# Altium PCB 第十二届直立摄像头.PcbDoc (part 1 of 3)
Units mil, origin at the board's own origin, x right, y up, seen from the top; angles counter-clockwise.
Board outline 3925 x 2095 mil, 2 copper layers (Top Layer, Bottom Layer); 127 components, 103 nets, 557 pads, 326 vias.
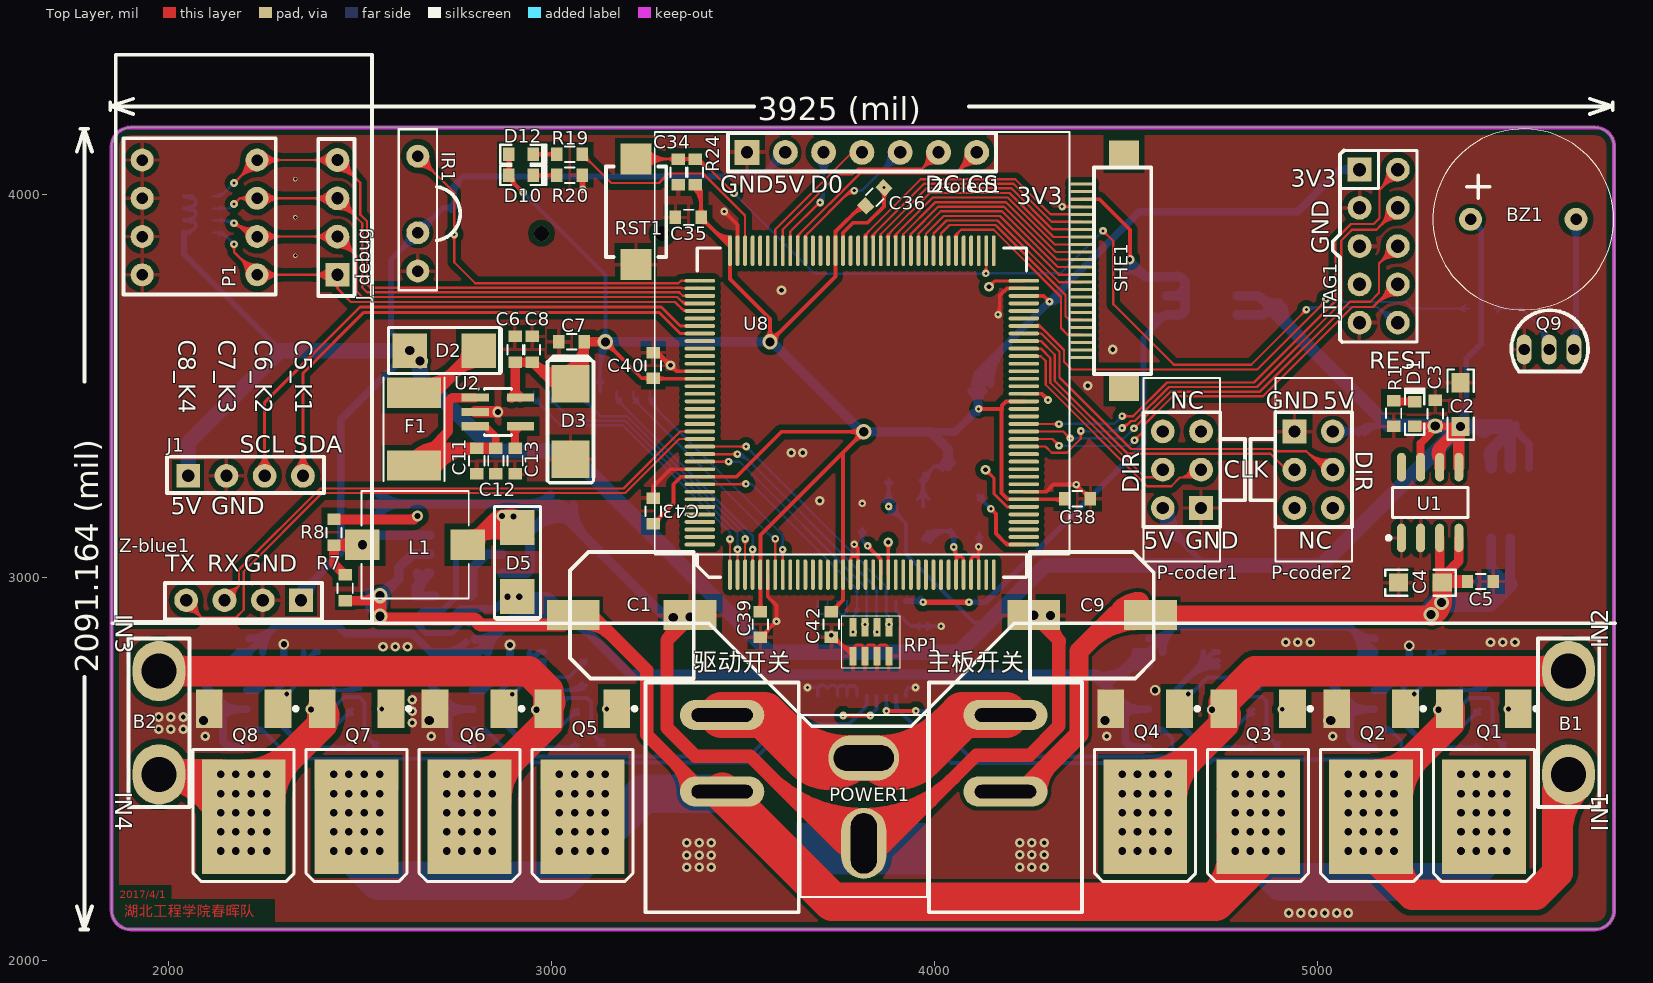
[diagram p0: Top Layer view]
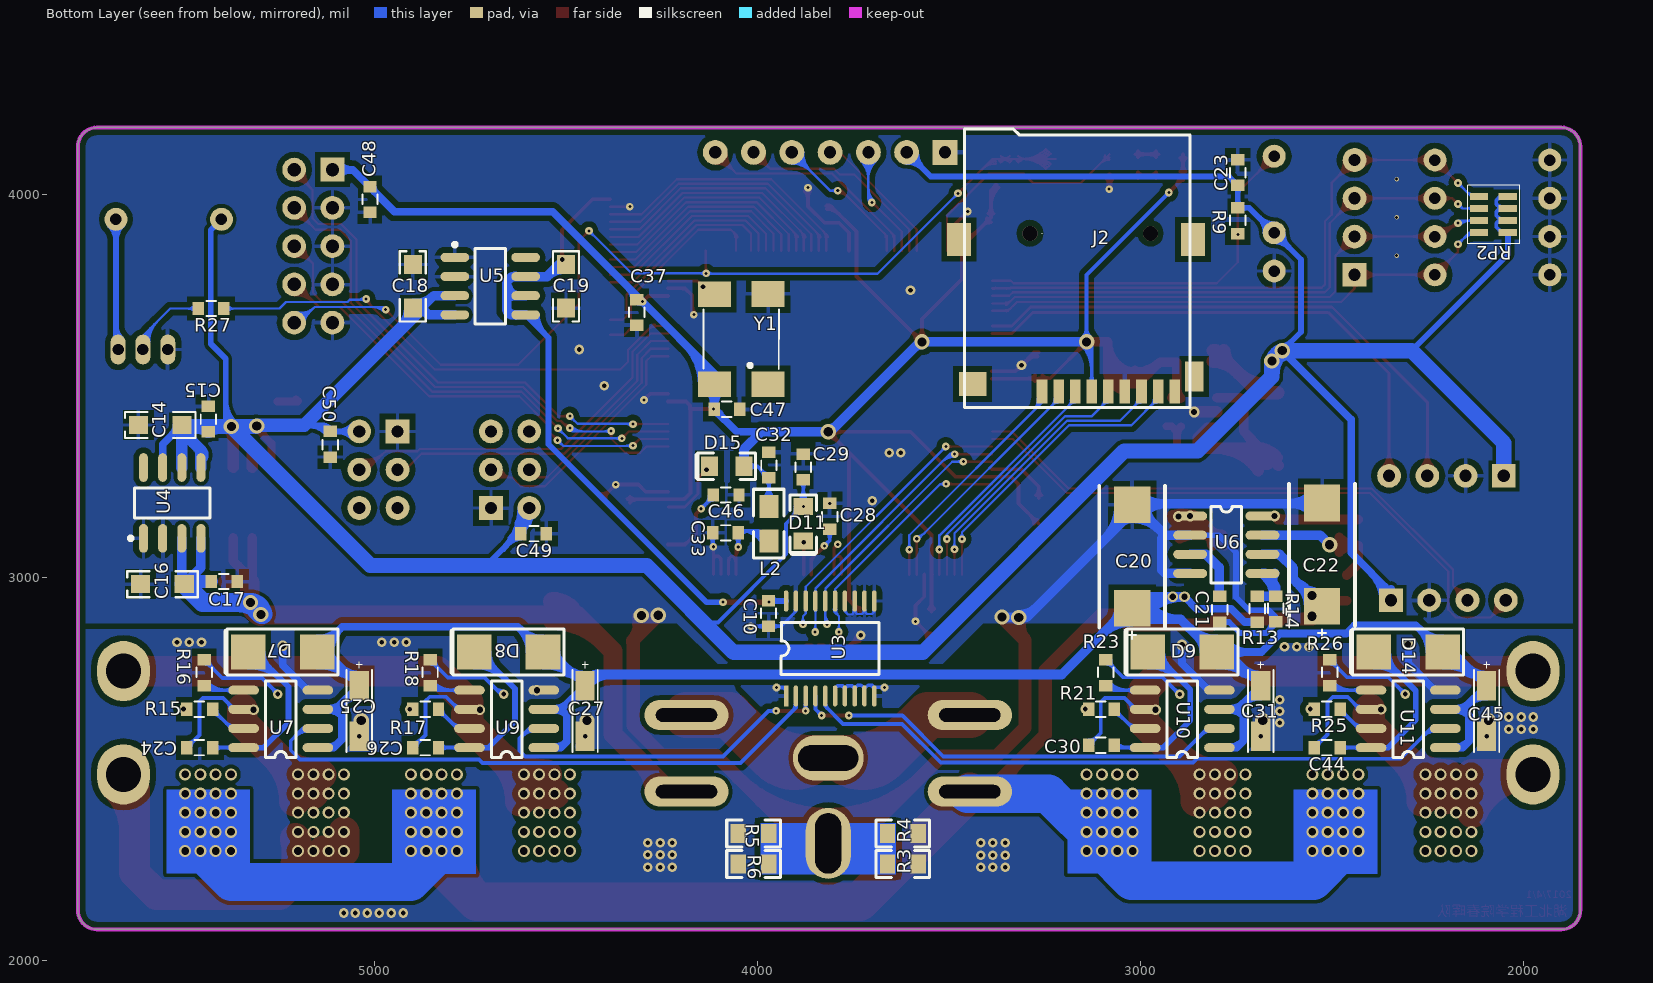
[diagram p1: Bottom Layer view, seen from below]

## Layer stack, top to bottom
Top Layer: signal copper 1.4
Dielectric: dielectric 12.6, FR-4, Dk 4.8
Bottom Layer: signal copper 1.4

## Board outline
1900,2080 cw(c1900,2130) 1850,2130 1850,4125 cw(c1900,4125) 1900,4175 5725,4175 cw(c5725,4125) 5775,4125 5775,2130 cw(c5725,2130) 5725,2080

## Design rules (kind name [scope] priority, off if disabled: settings)
Clearance Clearance_Name [WithinRoom('Name')] p1: gap=6
Clearance Clearance_5V [InNet('5V')] p2: gap=10
Clearance Clearance_D7V2 [InNet('D7V2')] p3: gap=10
Clearance Clearance_M7V2 [InNet('M7V2')] p4: gap=10
Clearance Clearance_7V2 [InNet('7V2')] p5: gap=12
Clearance Clearance_Polygon [InPolygon] p6: gap=15
Clearance [All] p7: gap=6
ComponentClearance [All] p1: gap=0 collisioncheckmode=3 verticalgap=0 showdistances=FALSE
PolygonConnect PolygonConnect_PGND [InNet('PGND')] p1: connectstyle=Direct reliefconductorwidth=10 reliefentries=4 polygonreliefangle="90 Angle"
PolygonConnect PolygonVia [isvia] p2: connectstyle=Direct reliefconductorwidth=10 reliefentries=4 polygonreliefangle="90 Angle"
PolygonConnect [All] p3: connectstyle=Relief reliefconductorwidth=10 reliefentries=4 polygonreliefangle="90 Angle"
RoutingVias [All] p1: holewidth=12 width=25 viastyle="Through Hole" minholewidth=8 minwidth=20 maxholewidth=28 maxwidth=50
SilkscreenOverComponentPads [All] p1: minsilkscreentomaskgap=10
SolderMaskExpansion [All] p1: expansion=4
Width [All] p1: maxlimit=150 minlimit=6 preferedwidth=6
26 further rules are at their usual default settings.

## Components (designator, comment, footprint, x,y, rotation, side; value= is the part's Value field where it differs from the comment)
B1 "Motor" KF301-2P 5656,2620 r0 top
B2 "Motor" KF301-2P 1974,2620 r180 top
BZ1 "BUZZ" BUZZ 5400,3935 r0 top
C1 "CAP2" 铝电解电容10*10.2 3046,2901 r0 top
C2 "10uF" 3216 5374,3451 r90 top
C3 "100uF" 0603(1608) 5308,3430 r270 top
C4 "10uF" 3216 5269,2986 r180 top
C5 "100nF" 0603(1608) 5424,2989 r0 top
C6 "2.2uF" 0603(1608) 2904,3597 r270 top
C7 "10uF" 0603(1608) 3050,3615 r0 top
C8 "100nF" 0603(1608) 2949,3597 r270 top
C9 "CAP2" 铝电解电容10*10.2 4574,2901 r180 top
C10 "Cap" 0603(1608) 3971,2904 r90 bottom
C11 "100nF" 0603(1608) 2804,3302 r90 top
C12 "22uF" 0603(1608) 2854,3302 r90 top
C13 "470pF" 0603(1608) 2904,3302 r90 top
C14 "10uF" 3216 5560,3398 r0 bottom
C15 "100nF" 0603(1608) 5434,3415 r270 bottom
C16 "10uF" 3216 5554,2982 r0 bottom
C17 "100nF" 0603(1608) 5391,2989 r0 bottom
C18 "0.1uF" 3216 4900,3760 r90 bottom
C19 "10uF" 3216 4500,3760 r270 bottom
C20 "Cap Pol1" TAN-D7343 3021,3054 r90 bottom
C21 "Cap" 0603(1608) 2792,2918 r270 bottom
C22 "Cap Pol1" TAN-D7343 2525,3059 r90 bottom
C23 "100nF" 0603(1608) 2745,4059 r270 bottom
C24 "Cap" 0603(1608) 5455,2555 r0 bottom
C25 "Cap Pol1" Tan-A3216 5040,2651 r270 bottom
C26 "Cap" 0603(1608) 4865,2555 r0 bottom
C27 "Cap Pol1" Tan-A3216 4450,2651 r270 bottom
C28 "100nF" 0603(1608) 3811,3161 r270 bottom
C29 "100nF" 0603(1608) 3880,3290 r270 bottom
C30 "Cap" 0603(1608) 3100,2561 r0 bottom
C31 "Cap Pol1" Tan-A3216 2685,2651 r270 bottom
C32 "100nF" 0603(1608) 3970,3295 r270 bottom
C33 "10nF" 0603(1608) 4085,3116 r180 bottom
C34 "100nF" 0603(1608) 3330,4060 r270 top
C35 "100nF" 0603(1608) 3355,3940 r0 top
C36 "100nF" 0603(1608) 3845,3995 r225 top
C37 "100nF" 0603(1608) 4315,3690 r90 bottom
C38 "100nF" 0603(1608) 4375,3205 r180 top
C39 "100nF" 0603(1608) 3545,2875 r90 top
C40 "100nF" 0603(1608) 3265,3555 r270 top
C42 "100nF" 0603(1608) 3730,2875 r90 top
C43 "100nF" 0603(1608) 3265,3175 r270 top
C44 "Cap" 0603(1608) 2510,2555 r0 bottom
C45 "Cap Pol1" Tan-A3216 2095,2651 r270 bottom
C46 "100nF" 0603(1608) 4080,3215 r0 bottom
C47 "100nF" 0603(1608) 4078,3439 r0 bottom
C48 "100nF" 0603(1608) 5012,3985 r90 bottom
C49 "100nF" 0603(1608) 4586,3114 r180 bottom
C50 "100nF" 0603(1608) 5116,3349 r270 bottom
D1 "LED" 0603LED 5254,3427 r90 top
D2 "IN5819" SS14 2719,3592 r0 top
D3 "ZM4729A" LL-41 3049,3407 r90 top
D5 "IN5819" SS14 2910,3040 r270 top
D7 "IN5819" SS14 5240,2805 r0 bottom
D8 "IN5819" SS14 4650,2805 r0 bottom
D9 "IN5819" SS14 2890,2805 r0 bottom
D10 "LED" 0603LED 2920,4050 r0 top
D11 "1SS355" 0805(有极性) 3880,3140 r270 bottom
D12 "LED" 0603LED 2920,4105 r0 top
D14 "IN5819" SS14 2300,2805 r0 bottom
D15 "1SS355" 0805(有极性) 4080,3290 r0 bottom
F1 "300mA" 保险丝 2640,3387 r90 top
IR1 "IR" IR2 2650,3800 r90 top
J1 "CON4" CON4-1 2050,3265 r0 top
J2 "9pin" SD 2910,3485 r0 bottom
J_debug "CON4" CON4-1 2440,3790 r90 top
JTAG1 "JTAG" IDC5X2 5160,3865 r270 top
L1 "Inductor" 贴片电感7*7*4 2643,3085 r0 top
L2 "120ohm" "0805 - duplicate" 3970,3140 r90 bottom
P1 "侧拨4P" 侧拨4P 1930,4190 r0 top
P-coder1 "ENCODER" ENCODER 4696,3181 r180 top
P-coder2 "ENCODER" ENCODER 4940,3381 r0 top
POWER1 "" T槽 3830,2305 r270 top
Q1 "IR7843" LR7843 5435,2515 r90 top
Q2 "IR7843" LR7843 5140,2515 r90 top
Q3 "IR7843" LR7843 4845,2515 r90 top
Q4 "IR7843" LR7843 4550,2515 r90 top
Q5 "IR7843" LR7843 3080,2515 r90 top
Q6 "IR7843" LR7843 2785,2515 r90 top
Q7 "IR7843" LR7843 2490,2515 r90 top
Q8 "IR7843" LR7843 2195,2515 r90 top
Q9 "NPNS9013" S9013 5505,3595 r0 top
R1 "10K" 0603(1608) 5199,3426 r90 top
R3 "0R" 0805(2012) 3620,2251 r0 bottom
R4 "0R" 0805(2012) 3620,2331 r0 bottom
R5 "0R" 0805(2012) 4010,2331 r180 bottom
R6 "0R" 0805(2012) 4010,2251 r180 bottom
R7 "Res2" 0603(1608) 2460,2974 r270 top
R8 "180R" 0603(1608) 2431,3119 r270 top
R9 "1K" 0603(1608) 2745,3930 r90 bottom
R13 "Res2" 0603(1608) 2694,2915 r90 bottom
R14 "Res2" 0603(1608) 2646,2916 r90 bottom
R15 "Res2" 0603(1608) 5455,2655 r0 bottom
R16 "Res2" 0603(1608) 5445,2749 r90 bottom
R17 "Res2" 0603(1608) 4865,2655 r0 bottom
R18 "Res2" 0603(1608) 4855,2749 r90 bottom
R19 "1K" 0603(1608) 3045,4050 r0 top
R20 "1K" 0603(1608) 3045,4105 r0 top
R21 "Res2" 0603(1608) 3100,2655 r0 bottom
R23 "Res2" 0603(1608) 3090,2749 r90 bottom
R24 "4.7K" 0603(1608) 3375,4060 r270 top
R25 "Res2" 0603(1608) 2510,2655 r0 bottom
R26 "Res2" 0603(1608) 2505,2749 r90 bottom
R27 "1K" 0603(1608) 5429,3702 r180 bottom
RP1 "10K" RA_8#1 3881,2794 r90 top
RP2 "HEADER4*2" RA_8#2 2115,3995 r180 bottom
RST1 "SW-PB" SMT_BUTTON 3220,3955 r270 top
SHE1 "CON24" 24P压线头 4365,3830 r90 top
U1 "TPS7350" SOIC-8 5294,3196 r90 top
U2 "MIC5219" SOT-23-5 2859,3432 r270 top
U3 "74LVC245" "74LVC245 TSSOP" 3925,2690 r90 bottom
U4 "TPS7350" SOIC-8 5529,3195 r90 bottom
U5 "TPS7333" SOIC-8 4697,3761 r180 bottom
U6 "MC34063" MC34063 2775,3085 r180 bottom
U7 "IR2104S" IR2104 5245,2630 r0 bottom
U8 "MK60DN512ZVLQ10" LQFP-144 3810,3430 r90 top
U9 "IR2104S" IR2104 4655,2630 r0 bottom
U10 "IR2104S" IR2104 2890,2630 r0 bottom
U11 "IR2104S" IR2104 2300,2630 r0 bottom
Y1 "CRYSTAL" SMD7050 4042,3622 r90 bottom
Z-blue1 "CON4" BLUETOOTH 2195,2940 r180 top
Z-oled1 "CON7" CON7_OLED 3810,4110 r0 top
主板开关 "主板开关" 船型开关-SMALL 4185,2350 r0 top (schematic designator 主板开关1)
驱动开关 "驱动开关" 船型开关-SMALL 3445,2350 r0 top (schematic designator 驱动开关1)

## Footprints (in the part's own frame and the unit in brackets; to place one, negate y for a bottom-side part, rotate by r counter-clockwise, add the part's x,y. Pads: shape width x height; smd on the part's side, far side on the other; paste and mask are expansions set on the pad)
24P压线头 [mm]
  rrect50% 0.2x1.5 smd: 1(5,-0.5) 2(4.5,-0.5) 3(4,-0.5) 4(3.5,-0.5) 5(3,-0.5) 6(2.5,-0.5) 7(2,-0.5) 8(1.5,-0.5) 9(1,-0.5) 10(0.5,-0.5) 11(0,-0.5) 12(-0.5,-0.5) 13(-1,-0.5) 14(-1.5,-0.5) 15(-2,-0.5) 16(-2.5,-0.5) 17(-3,-0.5) 18(-3.5,-0.5) 19(-4,-0.5) 20(-4.5,-0.5) 21(-5,-0.5) 22(-5.5,-0.5) 23(-6,-0.5) 24(-6.5,-0.5)
  rect 1.8x2 smd: 25(-8.5,-3.3) 26(7,-3.3)
  silkscreen extent -7.6,-5.1 6.1,-1.3
"74LVC245 TSSOP" [mm]
  rect 1.4x0.3 smd: 1(0,0)
  oval 1.4x0.3 smd: 2(0,-0.65) 3(0,-1.3) 4(0,-1.95) 5(0,-2.6) 6(0,-3.25) 7(0,-3.9) 8(0,-4.55) 9(0,-5.2) 10(0,-5.85) 11(6.3,-5.85) 12(6.3,-5.2) 13(6.3,-4.55) 14(6.3,-3.9) 15(6.3,-3.25) 16(6.3,-2.6) 17(6.3,-1.95) 18(6.3,-1.3) 19(6.3,-0.65) 20(6.3,0)
  silkscreen extent 1.43,-6.18 4.87,0.33
0603(1608) [mil]
  rect 30x35 smd: 1(-32,0) 2(35,0)
  silkscreen extent -10,-20 15,20
0603LED [mil]
  rect 30x35 smd: 1(-32,0) 2(32,0)
  silkscreen extent -55,-25 66,25
"0805 - duplicate" [mil]
  rect 60x50 smd: 1(-45,0) 2(45,0)
  silkscreen extent -90,-40 90,40
0805(2012) [mil]
  rect 40x50 smd: 1(-40,0) 2(40,0)
  silkscreen extent -70,-35 70,35
0805(有极性) [mil]
  rect 45x50 smd: 1(-45,0) 2(45,0)
  silkscreen extent -75,-35 80,35
3216 [mil]
  rect 50x47.24 smd: 1(-57,0) 2(57,0)
  silkscreen extent -92,-34 92,34
BLUETOOTH [mil]
  rect 62x62 hole 32: 1(-150,0)
  round 62 hole 32: 2(-50,0) 3(50,0) 4(150,0)
  silkscreen extent -335,-1425 334,57
BUZZ [mil]
  round 60 hole 30: 1(0,0) 2(275.59,0)
  silkscreen extent -98,-236 374,236
CON4-1 [mil]
  rect 62x62 hole 32: 1(0,0)
  round 62 hole 32: 2(100,0) 3(200,0) 4(300,0)
  silkscreen extent -55,-45 355,50
CON7_OLED [mil]
  rect 65x65 hole 32: 1(-300,0)
  round 65 hole 32: 2(-200,0) 3(-100,0) 4(0,0) 5(100,0) 6(200,0) 7(300,0)
  silkscreen extent -541,-1050 542,53
ENCODER [mil]
  rect 62x62 hole 32: 1(0,0)
  round 62 hole 32: 2(0,-100) 3(0,-200) 4(100,-200) 5(100,-100) 6(100,0)
  silkscreen extent -115,-340 150,140
IDC5X2 [mil]
  rect 62x62 hole 35: 1(-200,-50)
  round 62 hole 35: 2(-100,-50) 3(0,-50) 4(100,-50) 5(200,-50) 6(200,50) 7(100,50) 8(0,50) 9(-100,50) 10(-200,50)
  silkscreen extent -250,-120 250,100
IR2 [mil]
  round 60 hole 30: 1(0,0) 2(100,0) 3(300,0)
  silkscreen extent -50,-111 370,50
IR2104 [mil]
  oval 80x23.62 smd: 1(-97,75) 2(-97,25) 3(-97,-25) 4(-97,-75) 5(97,-75) 6(97,-25) 7(97,25) 8(97,75)
  silkscreen extent -40,-98 40,100
KF301-2P [mm]
  oval 3.5x4 hole 2.3 paste+0: 1(0,-3.429)
  oval 3.5x4 hole 2.3: 2(0,3.429)
  silkscreen extent -2.03,-5.59 2.03,5.59
LL-41 [mm]
  rect 2.5x2.5 smd: 1(-2.5,0) 2(2.5,0)
  silkscreen extent -4.06,-1.52 4.32,1.52
LQFP-144 [mil]
  oval 80x10 smd: 1(-423.07,344.49) 2(-423.07,324.8) 3(-423.07,305.12) 4(-423.07,285.43) 5(-423.07,265.75) 6(-423.07,246.06) 7(-423.07,226.38) 8(-423.07,206.69) 9(-423.07,187.01) 10(-423.07,167.32) 11(-423.07,147.64) 12(-423.07,127.95) 13(-423.07,108.27) 14(-423.07,88.58) 15(-423.07,68.9) 16(-423.07,49.21) 17(-423.07,29.53) 18(-423.07,9.84) 19(-423.07,-9.84) 20(-423.07,-29.53) 21(-423.07,-49.21) 22(-423.07,-68.9) 23(-423.07,-88.58) 24(-423.07,-108.27) 25(-423.07,-127.95) 26(-423.07,-147.64) 27(-423.07,-167.32) 28(-423.07,-187.01) 29(-423.07,-206.69) 30(-423.07,-226.38) 31(-423.07,-246.06) 32(-423.07,-265.75) 33(-423.07,-285.43) 34(-423.07,-305.12) 35(-423.07,-324.8) 36(-423.07,-344.49) 73(423.07,-344.49) 74(423.07,-324.8) 75(423.07,-305.12) 76(423.07,-285.43) 77(423.07,-265.75) 78(423.07,-246.06) 79(423.07,-226.38) 80(423.07,-206.69) 81(423.07,-187.01) 82(423.07,-167.32) 83(423.07,-147.64) 84(423.07,-127.95) 85(423.07,-108.27) 86(423.07,-88.58) 87(423.07,-68.9) 88(423.07,-49.21) 89(423.07,-29.53) 90(423.07,-9.84) 91(423.07,9.84) 92(423.07,29.53) 93(423.07,49.21) 94(423.07,68.9) 95(423.07,88.58) 96(423.07,108.27) 97(423.07,127.95) 98(423.07,147.64) 99(423.07,167.32) 100(423.07,187.01) 101(423.07,206.69) 102(423.07,226.38) 103(423.07,246.06) 104(423.07,265.75) 105(423.07,285.43) 106(423.07,305.12) 107(423.07,324.8) 108(423.07,344.49)
  oval 10x80 smd: 37(-344.49,-423.07) 38(-324.8,-423.07) 39(-305.12,-423.07) 40(-285.43,-423.07) 41(-265.75,-423.07) 42(-246.06,-423.07) 43(-226.38,-423.07) 44(-206.69,-423.07) 45(-187.01,-423.07) 46(-167.32,-423.07) 47(-147.64,-423.07) 48(-127.95,-423.07) 49(-108.27,-423.07) 50(-88.58,-423.07) 51(-68.9,-423.07) 52(-49.21,-423.07) 53(-29.53,-423.07) 54(-9.84,-423.07) 55(9.84,-423.07) 56(29.53,-423.07) 57(49.21,-423.07) 58(68.9,-423.07) 59(88.58,-423.07) 60(108.27,-423.07) 61(127.95,-423.07) 62(147.64,-423.07) 63(167.32,-423.07) 64(187.01,-423.07) 65(206.69,-423.07) 66(226.38,-423.07) 67(246.06,-423.07) 68(265.75,-423.07) 69(285.43,-423.07) 70(305.12,-423.07) 71(324.8,-423.07) 72(344.49,-423.07) 109(344.49,423.07) 110(324.8,423.07) 111(305.12,423.07) 112(285.43,423.07) 113(265.75,423.07) 114(246.06,423.07) 115(226.38,423.07) 116(206.69,423.07) 117(187.01,423.07) 118(167.32,423.07) 119(147.64,423.07) 120(127.95,423.07) 121(108.27,423.07) 122(88.58,423.07) 123(68.9,423.07) 124(49.21,423.07) 125(29.53,423.07) 126(9.84,423.07) 127(-9.84,423.07) 128(-29.53,423.07) 129(-49.21,423.07) 130(-68.9,423.07) 131(-88.58,423.07) 132(-108.27,423.07) 133(-127.95,423.07) 134(-147.64,423.07) 135(-167.32,423.07) 136(-187.01,423.07) 137(-206.69,423.07) 138(-226.38,423.07) 139(-246.06,423.07) 140(-265.75,423.07) 141(-285.43,423.07) 142(-305.12,423.07) 143(-324.8,423.07) 144(-344.49,423.07)
  silkscreen extent -430,-430 430,430
LR7843 [mm]
  rect 2.54x1.778 smd: 1(3.6,-2.28) 3(3.6,2.28)
  rect 7.6x5.55 smd: 2(-3.556,0)
  silkscreen extent -7.87,-3.58 3.72,3.35
MC34063 [mm]
  oval 2.25x0.6 smd: 1(-2.4,1.905) 2(-2.4,0.635) 3(-2.4,-0.635) 4(-2.4,-1.905) 5(2.4,-1.905) 6(2.4,-0.635) 7(2.4,0.635) 8(2.4,1.905)
  silkscreen extent -1.02,-2.55 1.02,2.55
RA_8#1 [mm]
  rect 1.22x0.45 smd: 1(0,0) 2(1.92,0) 3(0,0.8) 4(1.92,0.8) 5(0,1.6) 6(1.92,1.6) 7(0,2.4) 8(1.92,2.4)
  silkscreen extent -0.76,-0.75 2.69,3.15
RA_8#2 [mm]
  rect 1.22x0.45 smd: 1(0,0) 2(1.92,0) 3(0,-0.8) 4(1.92,-0.8) 5(0,-1.6) 6(1.92,-1.6) 7(0,-2.4) 8(1.92,-2.4)
  silkscreen extent -0.76,-3.15 2.69,0.75
S9013 [mil]
  oval 39x78 hole 30: 1(100,0) 2(35,0) 3(165,0)
  silkscreen extent 2,-58 202,103
SD [mm]
  rect 0.7x1.6 smd: 1(8.8,0) 2(7.7,0) 3(6.6,0) 4(5.5,0) 5(4.4,0) 6(3.3,0) 7(2.2,0) 8(1.1,0) 9(0,0)
  rect 1.2x2 smd: ""(-1.3,-1)
  rect 1.6x2.2 smd: ""(-1.21,-10.1) ""(14.3,-10.1)
  rect 1.8x1.6 smd: ""(13.4,-0.5)
  silkscreen extent -1.01,-17.42 13.94,1.06
SMD7050 [mil]
  rect 66.93x86.61 smd: 1(-118,-70) 2(118,-70) 3(117,70) 4(-118,70)
  silkscreen extent -78,-98 78,99
SMT_BUTTON [mil]
  rect 80x80 smd: 1(-137.8,0) 2(137.8,0)
  silkscreen extent -118,-79 118,79
SOIC-8 [mm]
  oval 1.9x0.6 smd: 1(-2.37,1.895) 2(-2.37,0.625) 3(-2.37,-0.645) 4(-2.37,-1.915) 5(2.33,-1.915) 6(2.33,-0.645) 7(2.33,0.625) 8(2.33,1.895)
  silkscreen extent -2.49,-2.51 0.98,2.87, body extent -2.02,-2.51 1.98,2.49, height 1.75
SOT-23-5 [mm]
  rect 0.55x1.8 smd: 1(-0.95,-1.5) 2(0,-1.5) 3(0.95,-1.5) 4(0.95,1.5) 5(-0.95,1.5)
  silkscreen extent -1.57,-1.35 1.55,0.9
SS14 [mm]
  rect 2.3x2.3 smd: 1(-2.286,0) 2(2.286,0)
  silkscreen extent -3.68,-1.52 3.81,1.52
Tan-A3216 [mil]
  rect 77.36x50 smd: 1(-66,0) 2(66,0)
  silkscreen extent -128,-33 107,33
TAN-D7343 [mm]
  rect 2.425x2.41 smd: 1(-3.429,0) 2(3.429,0)
  silkscreen extent -5.46,-2.18 4.7,2.18
T槽 [mm]
  oval 3x4.7 hole 1.7 slot 4 at 90 deg: 1(-5.664,-0.381)
  oval 4.7x3 hole 1.7 slot 4 at 0 deg: 2(0,-0.381)
  silkscreen extent -8.51,-4.57 3.56,3.81
侧拨4P [mil]
  round 60 hole 30: 1(0,-100) 2(0,-200) 3(0,-300) 4(0,-400) 5(300,-400) 6(300,-300) 7(300,-200) 8(300,-100)
  silkscreen extent -49,-451 349,-43
保险丝 [mm]
  rect 2x3.6 smd: 1(-2.413,0) 2(2.413,0)
  silkscreen extent -3.43,-2.03 3.43,2.03
船型开关-SMALL [mil]
  oval 220x78.74 hole 35 slot 160 at 0 deg: 1(0,290) 2(0,90)
  silkscreen extent -200,-225 200,375
贴片电感7*7*4 [mm]
  rect 2.3x2 smd: 1(-3.5,0) 2(3.5,0)
  silkscreen extent -3.56,-3.56 3.56,3.56
铝电解电容10*10.2 [mm]
  rect 3.5x2 smd: 1(0.254,0) 2(8.001,0)
  silkscreen extent 0.04,-4.19 8.25,4.19

## Via types
v1: diameter 31.5, hole 19.68, Top Layer to Bottom Layer, 160 vias
v2: diameter 25, hole 12, Top Layer to Bottom Layer, 66 vias
v3: diameter 20, hole 8, Top Layer to Bottom Layer, 61 vias
v4: diameter 40, hole 24, Top Layer to Bottom Layer, 20 vias
v5: diameter 28, hole 16, Top Layer to Bottom Layer, 14 vias
v6: diameter 12, hole 8, Top Layer to Bottom Layer, 3 vias
v7: diameter 39.37, hole 39.37, Top Layer to Bottom Layer, 2 vias

## Nets (pads, with @x,y where several pads share a name; then routed paths per layer and width w, separated by ;. In a path a pad name is that pad's centre, name@x,y a point inside that pad or via, vN(x,y) a via of type N, cw(c..) or ccw(c..) an arc to the next point about the centre after c; other vN are vias at no path point)
3V3: C6.2 C7.2 C8.2 C32.2 C35.2 C36.2 C37.2 C38.2 C39.2 C40.2 C42.2 C43.2 C47.2 C48.2 D3.2 D10.1 D12.1 D15.1 J2.4 JTAG1.1 L2.2 R24.2 U2.5 U8.5 U8.16 U8.43 U8.56 U8.70 U8.94 U8.108 U8.122 U8.135 Y1.4 | length 9927
  Top Layer w10: D10.1@2880.93,4059.57 ccw(c2863.86,4076.64) 2888,4076.64 ccw(c2912.14,4076.64) D10.1@2895.07,4059.57 ; D12.1@2880.93,4095.43 cw(c2863.86,4078.36) 2888,4078.36 cw(c2912.14,4078.36) D12.1@2895.07,4095.43 ; D10.1@2888,4037.5 cw(c2888,4026.64) D10.1@2895.68,4034.32 ; D12.1@2888,4105 D10.1@2888,4050 2888,4042 v3(2925,4005) ; D10.1@2898,4047.5 ccw(c2935.42,4047.5) 2908.96,4021.04 ; v3@2920,4005 ccw(c2907.93,4005) 2916.46,4013.54 ccw(c2925,4022.07) v3@2925,4010 ; v4@3140,3600 cw(c3140,3563.79) 3165.61,3589.39 cw(c3191.21,3615) v4@3155,3615 ; v4(3140,3615) 3235,3520 C40.2@3265,3520 3266.42,3518.58 U8.122@3386.93,3518.58 ; C40.2@3255.43,3512.93 ccw(c3238.36,3495.86) 3238.36,3520 ccw(c3238.36,3544.14) C40.2@3255.43,3527.07 ; C43.2@3265,3140 3317.89,3192.89 3317.89,3242.89 3337.68,3262.68 U8.135@3386.93,3262.68 3482.68,3262.68 3600,3380 v4(3815,3380) 3760.79,3325.79 ; C43.2@3267.5,3150 ccw(c3267.5,3168.11) 3280.3,3155.3 ; C40.2@3274.57,3512.93 cw(c3288.22,3499.28) 3288.22,3518.58 ; C40.2@3274.57,3527.07 ccw(c3295.07,3547.57) 3295.07,3518.58 ; C43.2@3277.5,3140 cw(c3307.68,3140) 3286.34,3161.34 ; R24.2@3370.43,4017.93 cw(c3323.18,3970.68) 3390,3970.68 ; R24.2@3375,4025 3390,4010 C35.2@3390,3940 3465.51,3864.49 U8.108@3465.51,3853.07 3465.51,3779.49 3570,3675 v4(3570,3615) 3741.1,3786.1 U8.94@3741.1,3853.07 3741.1,3903.1 3808.25,3970.25 C36.2@3820.25,3970.25 ; R24.2@3377.5,4025 cw(c3347.32,3994.82) 3390,3994.82 ; C35.2@3382.93,3949.57 ccw(c3365.86,3966.64) 3390,3966.64 ccw(c3414.14,3966.64) C35.2@3397.07,3949.57 ; C35.2@3390,3927.5 cw(c3390,3897.32) 3411.34,3918.66 ; C35.2@3400,3937.5 ccw(c3418.11,3937.5) 3405.3,3924.7 ; 3425.25,3904.74 ccw(c3465.51,3945) U8.108@3465.51,3888.07 ; 3442.33,3887.67 ccw(c3465.51,3910.86) U8.108@3465.51,3878.07 ; 3459.4,3870.6 ccw(c3465.51,3876.72) U8.108@3465.51,3868.07 ; C39.2@3537.93,2917.07 ccw(c3520.86,2934.14) 3545,2934.14 ccw(c3569.14,2934.14) C39.2@3552.07,2917.07 ; C39.2@3545,2910 3545,3006.18 U8.5@3544.25,3006.93 3545.57,3008.25 3545.57,3110.57 3760.79,3325.79 ; v4@3559.39,3625.61 ccw(c3533.79,3651.21) 3570,3651.21 ccw(c3606.21,3651.21) v4@3580.61,3625.61 ; v4@3570,3630 ccw(c3570,3666.21) 3595.61,3640.61 ccw(c3621.21,3615) v4@3585,3615 ; C42.2@3730,2910 3760.79,2940.79 U8.16@3760.79,3006.93 3760.79,3325.79 ; C42.2@3732.5,2920 ccw(c3732.5,2938.11) 3745.3,2925.3 ; C42.2@3742.5,2910 cw(c3772.68,2910) 3751.34,2931.34 ; 3786.96,3948.96 cw(c3818.48,3917.44) C36.2@3818.48,3962.02 ; v4@3800,3380 cw(c3763.79,3380) 3789.39,3354.39 cw(c3815,3328.79) v4@3815,3365 ; C36.2@3804.03,3966.03 cw(c3818.48,3951.58) C36.2@3818.48,3972.02 ; v4@3804.39,3369.39 ccw(c3778.79,3343.79) 3778.79,3380 ccw(c3778.79,3416.21) v4@3804.39,3390.61 ; v3(4115,3440) 4175.6,3440 ; v3@4118.54,3436.46 cw(c4127.07,3427.93) 4127.07,3440 cw(c4127.07,3452.07) v3@4118.54,3443.54 ; 4186.65,3208.35 ccw(c4198.07,3219.78) U8.43@4198.07,3203.62 ; U8.56@4233.07,3459.53 4186.53,3459.53 4175.6,3448.6 4175.6,3440 ; U8.70@4233.07,3735.12 4284.88,3735.12 v3(4300,3720) ; v3@4295,3720 ccw(c4282.93,3720) 4291.46,3728.54 ccw(c4300,3737.07) v3@4300,3725 ; 4313.15,3203.62 cw(c4313.15,3175.65) C38.2@4332.93,3195.43 ; 4318.57,3203.62 ccw(c4318.57,3223.93) C38.2@4332.93,3209.57 ; C38.2@4340,3205 4338.62,3203.62 U8.43@4233.07,3203.62 4191.38,3203.62 4175,3220 4175,3439.4 4175.6,3440
  Top Layer w25: U2.5@2894.17,3467.89 ccw(c2886.76,3483.46) 2904,3483.46 ; U2.5@2894.63,3468.22 ccw(c2872.02,3490.83) 2904,3490.83 ; U2.5@2918.06,3469.4 2904,3483.46 ; 2978.03,3532.97 ccw(c3025.19,3580.12) D3.2@3045.44,3516.58 ; D3.2@3014,3540.43 D3.2@3049,3505.43 ; D3.2@3034.74,3539.25 ccw(c3002.8,3614.99) C7.2@3085,3615 ; D3.2@3037.85,3540.4 cw(c3011.16,3624.15) C8.2@2949,3562 ; D3.2@3044.45,3516.22 ccw(c3018.69,3577.32) 3085,3577.32 ; D3.2@3054.16,3493.18 ccw(c3034.57,3539.65) D3.2@3085,3539.65 ; v4(3140,3615) C7.2@3085,3615 ; 2904,3483.46 C6.2@2904,3562 C8.2@2949,3562 ; C8.2@2949,3562 3005.57,3505.43 D3.2@3049,3505.43 ; D3.2@3049,3505.43 3085,3541.43 C7.2@3085,3615
  Bottom Layer w10: v3@2925,4000 cw(c2925,3987.93) 2933.54,3996.46 cw(c2942.07,4005) v3@2930,4005 ; v3(2925,4005) 3140,3790 v4(3140,3615) 3126.54,3601.54 J2.4@3126.54,3485 ; J2.4@3120.33,3508.92 ccw(c3105.34,3523.91) 3126.54,3523.91 ccw(c3147.73,3523.91) J2.4@3132.74,3508.92 ; 3126.54,3546.28 cw(c3208.72,3546.28) v4@3150.61,3604.39 ; 3126.54,3570.42 cw(c3184.58,3570.42) v4@3143.54,3611.46 ; 3126.54,3594.56 cw(c3160.44,3594.56) v4@3136.46,3618.54 ; v4@3129.39,3625.61 ccw(c3103.79,3651.21) 3140,3651.21 ccw(c3176.21,3651.21) v4@3150.61,3625.61 ; L2.2@3955.86,3204.14 ccw(c3921.72,3238.28) 3970,3238.28 ccw(c4018.28,3238.28) L2.2@3984.14,3204.14 ; C32.2@3962.93,3252.93 cw(c3945.86,3235.86) 3970,3235.86 cw(c3994.14,3235.86) C32.2@3977.07,3252.93 ; L2.2@3970,3185 C32.2@3970,3260 4000,3290 ; C32.2@3972.5,3270 ccw(c3972.5,3288.11) 3985.3,3275.3 ; C32.2@3982.5,3260 cw(c4012.68,3260) 3991.34,3281.34 ; D15.1@4021,3279.5 ccw(c4000,3263.75) 4000,3290 ; D15.1@4021,3300.5 cw(c4000,3316.25) 4000,3290 ; D15.1@4035,3290 4000,3290
  Bottom Layer w20: 3990,3380 4054,3380 4112,3438 Y1.4@4112,3504 4112,3532 v3(4300,3720) 4535,3955 4948,3955 5030,4037 5057,4064 ; Y1.4@4095.41,3487.41 cw(c4055.35,3447.35) 4112,3447.35 cw(c4168.65,3447.35) Y1.4@4128.59,3487.41 ; C47.2@4099.05,3427.76 ccw(c4092.25,3453.13) v3(4115,3440) cw(c4129.19,3448.2) C47.2@4113.36,3452.44 ; C47.2@4100.2,3426.2 cw(c4113,3413.39) C47.2@4113,3431.5 ; Y1.4@4105.31,3504 cw(c4156.75,3504) 4120.37,3540.37 ; 4115.28,3459.59 ccw(c4135.12,3454.27) C47.2@4117.33,3444 ; Y1.4@4125.31,3504 cw(c4225.03,3504) 4154.52,3574.52 ; Y1.4@4145.31,3504 cw(c4293.32,3504) 4188.66,3608.66 ; 4291.16,3711.16 cw(c4312.5,3689.82) C37.2@4312.5,3720 ; C37.2@4322.5,3725 cw(c4364.75,3725) 4334.87,3754.87 ; C48.2@4998.49,4005.49 ccw(c4983.98,4020) C48.2@5004.5,4020 ; 5061.72,4064 cw(c5061.72,4016.72) JTAG1.1@5095.15,4050.15 ; JTAG1.1@5095.13,4079.83 cw(c5057,4117.84) 5057,4064 ; JTAG1.1@5110,4064 5057,4064
  Bottom Layer w25: v4(3140,3615) v4(3570,3615) 3575,3615 3810,3380 v4(3815,3380) 3990,3380 4035,3335 D15.1@4035,3290 ; v4@3570,3607.5 cw(c3570,3577.32) 3591.34,3598.66 ; 3793.66,3396.34 ccw(c3815,3417.68) v4@3815,3387.5 ; D15.1@4027.93,3299.57 ccw(c4010.86,3316.64) 4035,3316.64 ccw(c4059.14,3316.64) D15.1@4042.07,3299.57
5V: BZ1.1 C2.1 C3.2 C14.1 C15.2 C18.1 C23.2 C29.2 C49.1 C50.1 D1.1 D2.1 D11.1 IR1.2 J1.1 P-coder1.6 P-coder2.6 R9.2 RP2.2 RP2.4 RP2.6 RP2.8 U1.5 U1.6 U1.7 U4.5 U4.6 U4.7 U5.3 U5.4 Z-blue1.1 Z-oled1.2 | length 12861.5
  Top Layer w20: D1.1@5259,3394 v4(5374,3394) ; D1.1@5259,3400 D1.1@5254,3395 v4(5308,3395) 5308,3389 5269.39,3350.39 U1.7@5269.39,3287.73 ; 5281.44,3394 ccw(c5281.44,3421.56) 5300.93,3402.07 cw(c5283.86,3419.14) 5283.86,3395 cw(c5283.86,3370.86) 5300.93,3387.93 ccw(c5286.27,3373.27) 5286.27,3394 ; 5286.69,3367.69 ccw(c5259.37,3395) C3.2@5298,3395 ; 5290.95,3371.95 ccw(c5267.91,3395) C3.2@5300.5,3395 ; C3.2@5315.07,3387.93 cw(c5329.73,3373.27) 5329.73,3394 ; C3.2@5315.07,3402.07 ccw(c5334.56,3421.56) 5334.56,3394 ; C2.1@5364.37,3384.37 ccw(c5341.11,3361.11) 5341.11,3394 ccw(c5341.11,3426.89) C2.1@5364.37,3403.63 ; C2.1@5366.93,3386.93 ccw(c5349.86,3369.86) 5349.86,3394 ccw(c5349.86,3418.14) C2.1@5366.93,3401.07 ; C2.1@5386,3389 C2.1@5389,3386
  Top Layer w30: U1.6@5316.2,3313.32 cw(c5371.45,3313.32) 5332.39,3352.39 ; U1.6@5316.76,3311.53 cw(c5334.92,3323.87) 5319.39,3339.39 ; U1.6@5319.39,3287.73 5319.39,3339.39 ; U1.5@5369.39,3287.73 C2.1@5369.39,3389.39 ; 5369.39,3360.69 cw(c5405.94,3360.69) C2.1@5380.1,3386.53 ; C2.1@5369.39,3370.81 cw(c5397.19,3370.81) C2.1@5377.54,3390.46 ; v4(5374,3394) C2.1@5369.39,3389.39 ; 5319.39,3339.39 C2.1@5369.39,3389.39
  Bottom Layer w10: RP2.8@2039.41,3900.51 2055.51,3900.51 2070,3915 2070,3925 ; RP2.6@2039.41,3932.01 RP2.6@2057.01,3932.01 ; RP2.4@2039.41,3963.5 RP2.4@2058.5,3963.5 ; RP2.2@2039.41,3995 2060,3995 2070,3985 ; RP2.8@2054.57,3904.37 ccw(c2054.57,3915.97) RP2.8@2062.77,3907.77 ; RP2.6@2054.57,3935.87 ccw(c2054.57,3951.07) 2065.32,3940.32 ; RP2.4@2054.57,3967.36 ccw(c2054.57,3986.18) 2067.87,3972.87 ; RP2.2@2054.66,3991.14 cw(c2055.16,3970.16) 2070,3985 ; RP2.4@2055.22,3959.7 cw(c2058.07,3943.07) 2070,3955 ; RP2.6@2055.79,3928.35 cw(c2060.19,3915.19) 2070,3925 ; D11.1@3867.63,3197.37 ccw(c3837.75,3227.25) 3880,3227.25 ccw(c3922.25,3227.25) D11.1@3892.37,3197.37 ; C29.2@3872.93,3247.93 cw(c3855.86,3230.86) 3880,3230.86 cw(c3904.14,3230.86) C29.2@3887.07,3247.93 ; D11.1@3876.46,3188.54 ccw(c3867.93,3197.07) 3880,3197.07 ccw(c3892.07,3197.07) D11.1@3883.54,3188.54 ; D11.1@3880,3180 cw(c3880,3167.93) 3888.54,3176.46 cw(c3897.07,3185) D11.1@3885,3185 ; C29.2@3880,3255 v3(3880,3185) 3925,3140 3925,3060 4103,2882 4134,2882 ; D11.1@3882.5,3167.5 cw(c3882.5,3131.29) 3908.11,3156.89 ; D11.1@3900,3185 ccw(c3948.28,3185) 3914.14,3150.86 ; RP2.6@2057.01,3932.01 2070,3945 2070,3955 ; RP2.6@2057.01,3932.01 2062.99,3932.01 2070,3925 ; RP2.4@2058.5,3963.5 2070,3975 2070,3985 ; RP2.4@2058.5,3963.5 2061.5,3963.5 2070,3955
  Bottom Layer w15: RP2.8@2039.41,3900.51 2039.41,3843.59 2291,3592 ; v4@2616.5,3592 ccw(c2586.32,3592) 2607.66,3613.34 ccw(c2629,3634.68) v4@2629,3604.5 ; IR1.2@2627.5,3900 cw(c2573.18,3900) 2611.59,3861.59 cw(c2650,3823.18) IR1.2@2650,3877.5 ; v4(2629,3592) 2580,3641 2580,3830 IR1.2@2650,3900 2715,3965 R9.2@2745,3965 C23.2@2745,4024 2768,4047 3547,4047 Z-oled1.2@3610,4110 ; IR1.2@2650,3922.5 ccw(c2650,3976.82) 2688.41,3938.41 ccw(c2726.82,3900) IR1.2@2672.5,3900 ; R9.2@2737.2,3959.7 ccw(c2724.39,3946.89) 2724.39,3965 ccw(c2724.39,3983.11) R9.2@2737.2,3970.3 ; R9.2@2739.7,3970.3 ccw(c2726.89,3983.11) 2745,3983.11 ccw(c2763.11,3983.11) R9.2@2750.3,3970.3 ; C23.2@2739.7,4018.7 cw(c2726.89,4005.89) 2745,4005.89 cw(c2763.11,4005.89) C23.2@2750.3,4018.7 ; C23.2@2755,4024 cw(c2779.14,4024) 2762.07,4041.07 ; Z-oled1.2@3585,4110 cw(c3524.64,4110) 3567.32,4067.32 cw(c3610,4024.64) Z-oled1.2@3610,4085 ; P-coder1.6@4585.5,3159.97 cw(c4577.03,3143) 4596,3143 ; P-coder1.6@4589.5,3181 ccw(c4665.55,3181) C49.1@4611.77,3127.23 ; P-coder1.6@4596,3181 4596,3143 ; 4602.01,3136.99 cw(c4581.53,3116.5) C49.1@4610.5,3116.5 ; P-coder1.6@4604.5,3181 ccw(c4716.76,3181) 4637.38,3101.62 ; P-coder1.6@4606.5,3159.97 ccw(c4614.97,3143) 4596,3143 ; 4608.89,3132.23 ccw(c4624.65,3141.33) C49.1@4619.94,3123.74 ; 4608.96,3132.11 cw(c4593.36,3123.1) C49.1@4610.76,3118.44 ; C49.1@4611.29,3119.86 ccw(c4577.03,3137.03) 4613.4,3149.12 ; C49.1@4614.93,3123.34 ccw(c4606.92,3141.23) 4626.09,3145.31 ; C49.1@4616.87,3104.09 cw(c4606.97,3039.47) 4662.37,3074.18 ; C49.1@4618,3104 cw(c4618,3062.96) 4647.02,3091.98 ; C49.1@4619.14,3118.91 cw(c4613.52,3082.21) 4644.98,3101.92 ; P-coder1.6@4619.5,3181 ccw(c4767.97,3181) 4662.99,3076.01 ; C49.1@4620.93,3104.6 cw(c4626.83,3090.74) 4638.46,3100.31 ; C49.1@4621.07,3109.66 ccw(c4614.68,3123.91) C49.1@4629.95,3127.16 ; 4708,3031 4596,3143 ; P-coder2.6@5040,3381 C50.1@5116,3381 5132,3397 ; P-coder2.6@5056.62,3364.38 cw(c5096.73,3324.27) 5096.73,3381 cw(c5096.73,3437.73) P-coder2.6@5056.62,3397.62 ; C50.1@5108.2,3375.7 ccw(c5095.39,3362.89) 5095.39,3381 ccw(c5095.39,3399.11) C50.1@5108.2,3386.3 ; C50.1@5113.2,3386.3 cw(c5139.02,3360.48) 5139.02,3397 ; C50.1@5123.8,3375.7 cw(c5175.23,3324.27) 5175.23,3397 ; C50.1@5125.99,3381.38 cw(c5146.57,3382.43) 5132,3397 ; 5184,3397 5132,3397 ; v4@5365.16,3402.84 ccw(c5307.61,3460.39) 5389,3460.39 ; v4@5375.77,3392.23 ccw(c5343.82,3424.18) 5389,3424.18 ; v4@5389,3386 5389,3394 5389,3571 5428,3610 5428,3907 BZ1.1@5400,3935
  Bottom Layer w20: Z-blue1.1@2345,2970 2345,2960 2449,3064 2449,3412 v4(2629,3592) ; Z-blue1.1@2346,2940 cw(c2396.7,2940) 2360.85,2975.85 ; Z-blue1.1@2366,2940 cw(c2464.98,2940) 2394.99,3009.99 ; v4@2619,3592 cw(c2594.86,3592) 2611.93,3574.93 cw(c2629,3557.86) v4@2629,3582 ; C14.1@5503,3398 5553.61,3347.39 U4.7@5553.61,3286.73 ; C14.1@5504.38,3384.38 cw(c5504.38,3354.82) C14.1@5525.28,3375.72 ; C14.1@5518,3398 ccw(c5554.21,3398) 5528.61,3372.39
  Bottom Layer w25: U5.4@4790.31,3685.61 4858.61,3685.61 ; U5.3@4790.31,3735.61 4845.39,3735.61 ; C18.1@4895.09,3691.64 ccw(c4881.06,3663.15) 4858.61,3685.61 ; C18.1@4899.23,3715.47 cw(c4894.4,3784.61) 4845.4,3735.6 ; 4845.39,3735.61 4877,3704 4858.61,3685.61
  Bottom Layer w30: U4.5@5450.42,3312.32 cw(c5489.27,3312.32) 5461.8,3339.8 ; U4.5@5450.84,3310.73 cw(c5465.85,3319.37) 5453.61,3331.61 ; U4.5@5453.61,3286.73 5453.61,3331.61 ; 5473.91,3351.91 ccw(c5427.82,3398) C14.1@5493,3398 ; U4.6@5503.61,3286.73 5503.61,3381.61 5453.61,3331.61
  Bottom Layer w35: C18.1@4877,3704 5184,3397 5306,3397 v4(5308,3395) ; C18.1@4906.12,3701.62 ccw(c4970.69,3701.62) 4925.03,3655.97
  Bottom Layer w40: J1.1@2050,3265 2050,3351 2291,3592 v4(2629,3592) ; 2590.82,3592 cw(c2590.82,3499.82) v4(2656,3565) ; 2656,3526.82 ccw(c2563.82,3526.82) v4(2629,3592) ; v4@2656,3553.82 ccw(c2615.5,3553.82) v4(2629,3592) ; v4(5308,3395) 5309,3394 v4(5374,3394) ; 5409.77,3394 cw(c5409.77,3358.27) C15.2@5435.04,3383.54 ; C15.2@5432.96,3383.54 cw(c5458.23,3358.27) 5458.23,3394 ; C14.1@5499,3394 5389,3394 v4(5374,3394) ; v4(2629,3592) v4(2656,3565) ; v4(2656,3565) 2656,3524 2850,3330 3042,3330 3568,2804 4062,2804 4289,3031 4708,3031 5011,3031 v4(5374,3394)
7V2: POWER1.1 主板开关.1 驱动开关.1 | length 1513
  Top Layer w120: 驱动开关.1@3445,2640 3555,2640 3667,2528 ; 3587.62,2607.38 ccw(c3781.54,2801.29) POWER1.1@3781.54,2527.06 ; POWER1.1@3782.2,2527.32 cw(c3724.94,2585.94) 3667,2528 ; POWER1.1@3847.8,2527.32 ccw(c3904.06,2584.94) 3961,2528 ; POWER1.1@3848.46,2527.06 ccw(c3848.46,2796.46) 4038.96,2605.96 ; 主板开关.1@4185,2640 4073,2640 3961,2528 ; 3667,2528 POWER1.1@3815,2528 3961,2528
12V: C20.1 C25.1 C27.1 C31.1 C45.1 D5.2 D7.1 D8.1 D9.1 D14.1 R13.1 U7.1 U7.3 U9.1 U9.3 U10.1 U10.3 U11.1 U11.3 | length 8357.6
  Bottom Layer w20: C45.1@2095,2688.32 cw(c2095,2619.08) 2143.96,2668.04 ; C45.1@2095,2745.68 ccw(c2095,2814.92) 2143.96,2765.96 ; C45.1@2098.88,2745.17 ccw(c2115.91,2808.73) 2148.82,2751.74 ; C45.1@2103.69,2725.69 cw(c2210,2619.38) D14.1@2210,2769.72 ; 2137.83,2759.83 cw(c2210,2687.66) D14.1@2210,2789.72 ; 2141.31,2639.31 cw(c2174.81,2605.82) U11.3@2174.81,2653.19 ; 2141.31,2670.69 ccw(c2174.81,2704.18) U11.3@2174.81,2656.81 ; 2143.02,2569.98 ccw(c2174.81,2601.77) U11.1@2174.81,2556.81 ; U11.1@2203,2555 2158,2555 2141,2572 2141,2639 2157,2655 ; U11.3@2203,2655 2157,2655 ; D14.1@2210,2840.28 ccw(c2210,2925.44) 2270.22,2865.22 ccw(c2330.44,2805) D14.1@2245.28,2805 ; C31.1@2685,2688.32 cw(c2685,2619.08) 2733.96,2668.04 ; C31.1@2685,2745.68 ccw(c2685,2814.92) 2733.96,2765.96 ; C31.1@2688.88,2745.17 ccw(c2705.91,2808.73) 2738.82,2751.74 ; C31.1@2693.69,2725.69 cw(c2800,2619.38) D9.1@2800,2769.72 ; R13.1@2694,2883 2727,2883 2762,2918 2853,2918 v5(2884,2949) ; 2727.83,2759.83 cw(c2800,2687.66) D9.1@2800,2789.72 ; 2731.31,2639.31 cw(c2764.81,2605.82) U10.3@2764.81,2653.19 ; 2731.31,2670.69 ccw(c2764.81,2704.18) U10.3@2764.81,2656.81 ; 2733.02,2569.98 ccw(c2764.81,2601.77) U10.1@2764.81,2556.81 ; D9.1@2775.06,2780.06 ccw(c2714.84,2719.84) 2714.84,2805 ccw(c2714.84,2890.16) D9.1@2775.06,2829.94 ; U10.1@2793,2555 2748,2555 2731,2572 2731,2639 2747,2655 ; U10.3@2793,2655 2747,2655 ; D9.1@2800,2805 D9.1@2773,2805 ; C27.1@4450,2688.32 cw(c4450,2619.08) 4498.96,2668.04 ; C27.1@4450,2745.68 ccw(c4450,2814.92) 4498.96,2765.96 ; C27.1@4453.88,2745.17 ccw(c4469.77,2804.47) 4500.47,2751.3 ; C27.1@4462.22,2729.22 cw(c4560,2631.45) D8.1@4560,2769.72 ; 4496.31,2670.69 ccw(c4529.81,2704.18) U9.3@4529.81,2656.81 ; 4496.37,2763.37 cw(c4560,2699.73) D8.1@4560,2789.72 ; 4499.73,2569.27 ccw(c4529.81,2599.35) U9.1@4529.81,2556.81 ; D8.1@4515.34,2782.34 ccw(c4492.67,2805) D8.1@4524.72,2805 ; U9.3@4529.72,2653.19 ccw(c4527.56,2611.44) 4498,2641 ; U9.1@4558,2555 4514,2555 4498,2571 4498,2641 ; U9.3@4558,2655 4512,2655 ; D8.1@4560,2840.28 ccw(c4560,2925.44) 4620.22,2865.22 ccw(c4680.44,2805) D8.1@4595.28,2805 ; C25.1@5040,2688.32 cw(c5040,2619.08) 5088.96,2668.04 ; C25.1@5040,2745.68 ccw(c5040,2814.92) 5088.96,2765.96 ; C25.1@5043.88,2745.17 ccw(c5059.77,2804.47) 5090.47,2751.3 ; C25.1@5052.22,2729.22 cw(c5150,2631.45) D7.1@5150,2769.72 ; 5086.31,2639.31 cw(c5119.81,2605.82) U7.3@5119.81,2653.19 ; 5086.31,2670.69 ccw(c5119.81,2704.18) U7.3@5119.81,2656.81 ; 5086.37,2763.37 cw(c5150,2699.73) D7.1@5150,2789.72 ; 5094.85,2567.15 ccw(c5119.81,2592.11) U7.1@5119.81,2556.81 ; D7.1@5105.34,2782.34 ccw(c5082.67,2805) 5114.72,2805 ccw(c5029.56,2805) 5089.78,2865.22 ccw(c5150,2925.44) D7.1@5150,2840.28 ; U7.1@5148,2555 5107,2555 5085,2577 5085,2638 5102,2655 ; U7.3@5148,2655 5102,2655 ; 2157,2655 C45.1@2095,2717 2183,2805 D14.1@2210,2805 2280,2875 2440,2875 2462,2853 2635,2853 2683,2805 D9.1@2773,2805 ; 2747,2655 C31.1@2685,2717 D9.1@2773,2805 ; 4498,2641 4512,2655 ; 4512,2655 C27.1@4450,2717 4538,2805 D8.1@4560,2805 4626,2871 5084,2871 D7.1@5150,2805 5128,2805 C25.1@5040,2717 5102,2655
  Bottom Layer w25: D9.1@2800,2805 2809,2805 2894,2890 ; D9.1@2800,2837.78 ccw(c2800,2938.63) 2871.32,2867.32 ; D9.1@2832.78,2805 cw(c2890.18,2805) 2849.59,2845.59 ; 2936.98,2949 cw(c2936.98,2850.1) C20.1@3013.33,2912.98 ; 2943.89,2890 ccw(c2943.89,2976.31) C20.1@3013.04,2924.65 ; C20.1@2993.01,2939.62 cw(c2894.01,3013.58) 2894.01,2890 ; C20.1@2994.03,2897.08 ccw(c2884.01,2806.46) v5(2884,2949) 2991,2949 C20.1@3021,2919 ; C20.1@3021,2883.76 cw(c3021,2772.14) 3099.93,2851.07 ; C20.1@3055.94,2918.7 ccw(c3113.03,2918.7) 3072.66,2878.34 ; 4382.84,2746 cw(c4382.84,2663.52) C27.1@4441.16,2721.84 ; C27.1@4437.51,2730.16 ccw(c4421,2729.48) 4421,2746 ; C27.1@4444.61,2741.96 cw(c4435.66,2760.66) 4421,2746 ; C27.1@4450,2717 4421,2746 ; 2894,2890 2992,2890 C20.1@3021,2919 ; C20.1@3021,2919 3032,2919 3205,2746 4421,2746
  other v5: 2915,2949
BUZZ: R27.2 U8.66 | length 1441.9
  Top Layer w6: U8.66@4233.07,3656.38 4275.59,3656.38 4338,3593.97 4338,3563 4358,3543 4843,3543 v3@5025,3725 ; U8.66@4268.07,3654.38 cw(c4268.07,3631.39) 4284.33,3647.64 ; U8.66@4268.07,3660.38 cw(c4268.07,3651.87) 4274.08,3657.89 ; 5006.51,3706.51 ccw(c4986.03,3727) v3@5015,3727 ; 5016.76,3716.76 ccw(c5006.51,3727) v3@5021,3727
  Bottom Layer w6: v3@5025,3725 5065,3725 5071,3719 5231,3719 5248,3702 R27.2@5394,3702 ; v3@5026.95,3722.05 cw(c5034.07,3714.93) 5034.07,3725 ; v3@5026.95,3731.95 ccw(c5043.73,3748.73) 5043.73,3725 ; R27.2@5385.51,3693.51 ccw(c5365.03,3673.03) 5365.03,3702 ccw(c5365.03,3730.97) R27.2@5385.51,3710.49
  other v3: 5022,3727
CS_OLED: U8.99 Z-oled1.7 | length 876.8
  Top Layer w6: U8.99@3642.68,3853.07 3642.68,3892.68 3805,4055 4055,4055 Z-oled1.7@4110,4110 ; U8.99@3644.68,3888.07 cw(c3660.63,3888.07) 3649.35,3899.35 ; Z-oled1.7@4080.5,4110 cw(c4009.28,4110) 4059.64,4059.64 cw(c4110,4009.28) Z-oled1.7@4110,4080.5 ; Z-oled1.7@4086.5,4110 cw(c4029.77,4110) 4069.88,4069.88 cw(c4110,4029.77) Z-oled1.7@4110,4086.5 ; Z-oled1.7@4092.5,4110 cw(c4050.25,4110) 4080.13,4080.13 cw(c4110,4050.25) Z-oled1.7@4110,4092.5
D0_CLK: U8.100 Z-oled1.3 | length 666.1
  Top Layer w6: U8.100@3622.99,3853.07 3622.99,3902.99 3699,3979 v3(3701,3979) ; 3685.64,3965.64 cw(c3701,3950.27) v3@3701,3972 ; 3690.46,3970.46 ccw(c3681.93,3979) v3@3694,3979
  Bottom Layer w6: Z-oled1.3@3689.14,4089.14 cw(c3638.78,4038.78) 3710,4038.78 cw(c3781.22,4038.78) Z-oled1.3@3730.86,4089.14 ; Z-oled1.3@3693.38,4093.38 cw(c3653.27,4053.27) 3710,4053.27 cw(c3766.73,4053.27) Z-oled1.3@3726.62,4093.38 ; v3@3696.05,3983.95 ccw(c3662.37,4017.63) 3710,4017.63 ; Z-oled1.3@3697.63,4097.63 cw(c3667.75,4067.75) 3710,4067.75 cw(c3752.25,4067.75) Z-oled1.3@3722.37,4097.63 ; v3@3700.29,3979.71 ccw(c3676.86,4003.14) 3710,4003.14 ; v3(3701,3979) 3710,3988 Z-oled1.3@3710,4110 ; v3@3704.54,3975.46 ccw(c3691.34,3988.66) 3710,3988.66
D1_MISO_SIN: U8.102 Z-oled1.4 | length 365.3
  Top Layer w6: U8.102@3583.62,3853.07 3583.62,3908.62 3785,4110 Z-oled1.4@3810,4110